# Altium PCB LTC5582.PcbDoc
Units mm, origin at the board's own origin, x right, y up, seen from the top; angles counter-clockwise.
Board outline 51.82 x 23.88 mm, 2 copper layers (Top Layer, Bottom Layer); 9 components, 7 nets, 33 pads, 13 vias.
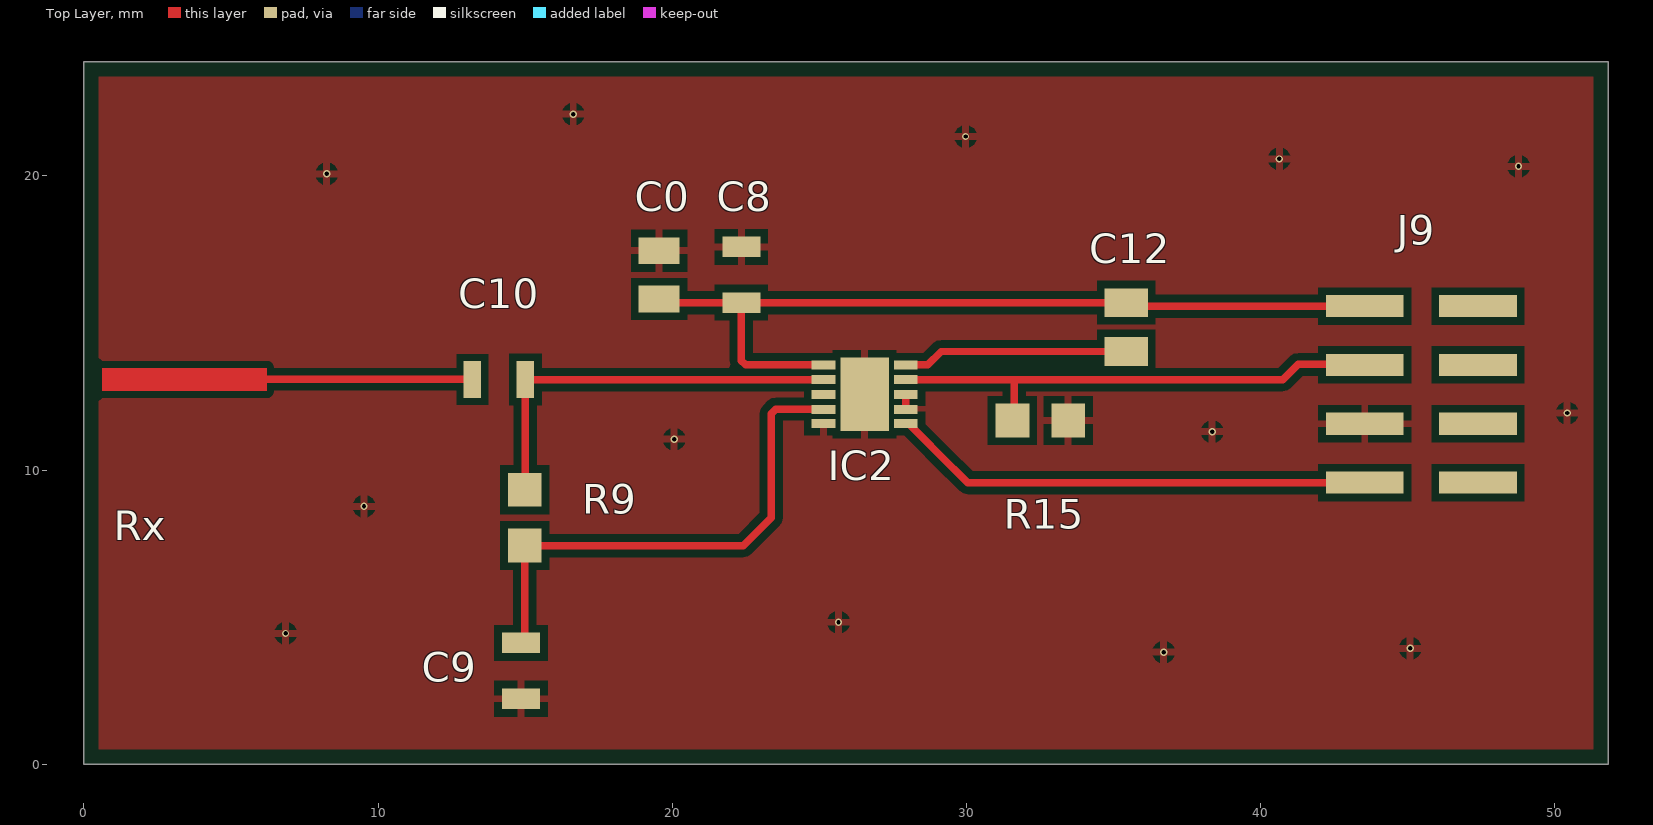
[diagram p0: Top Layer view]
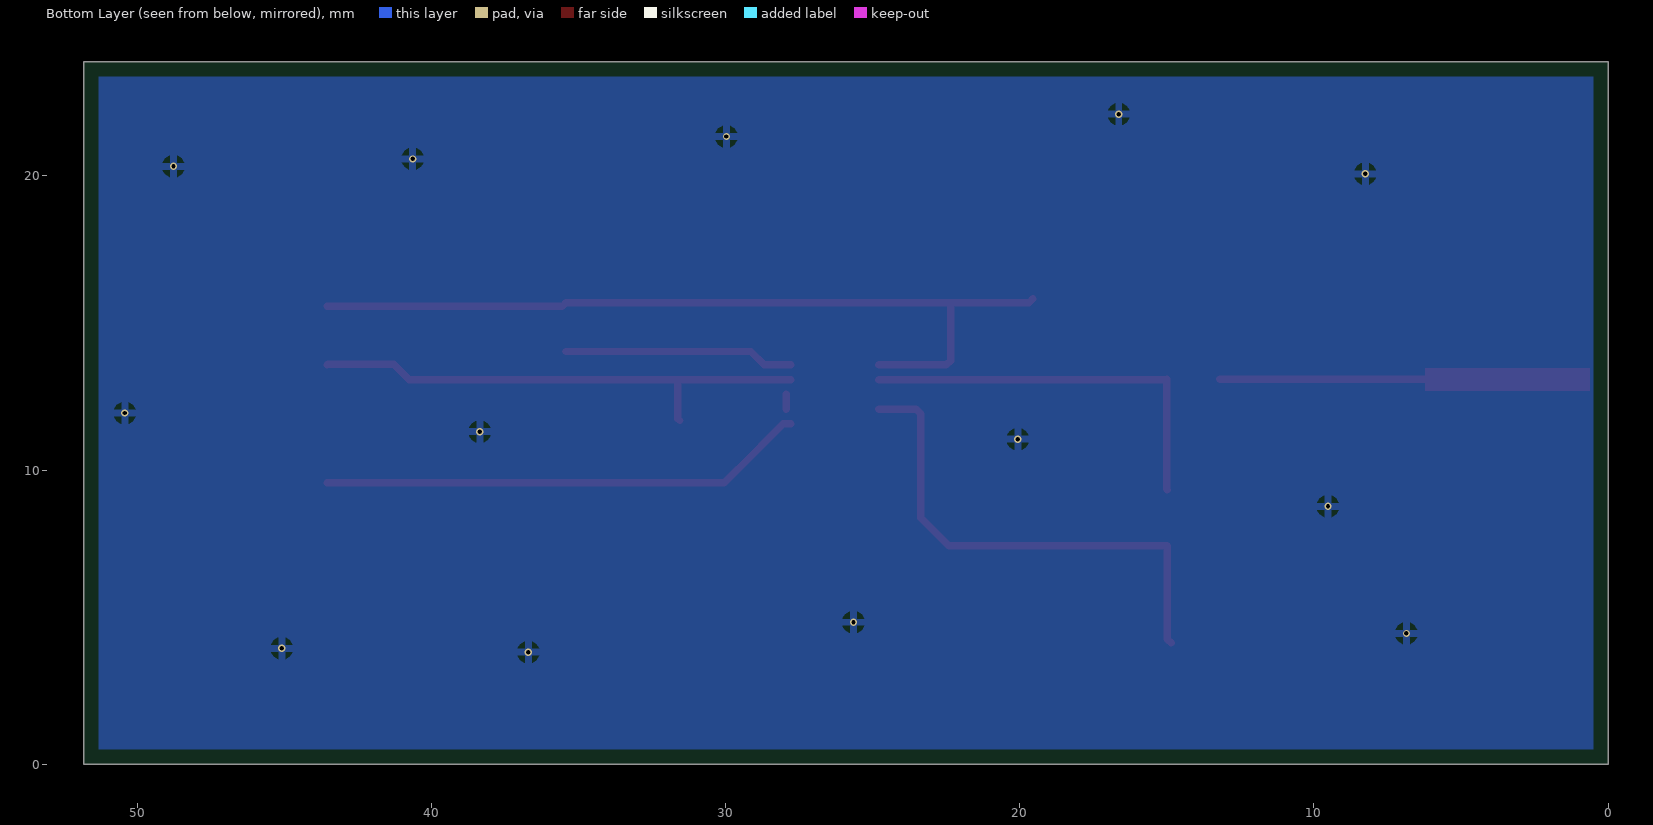
[diagram p1: Bottom Layer view, seen from below]
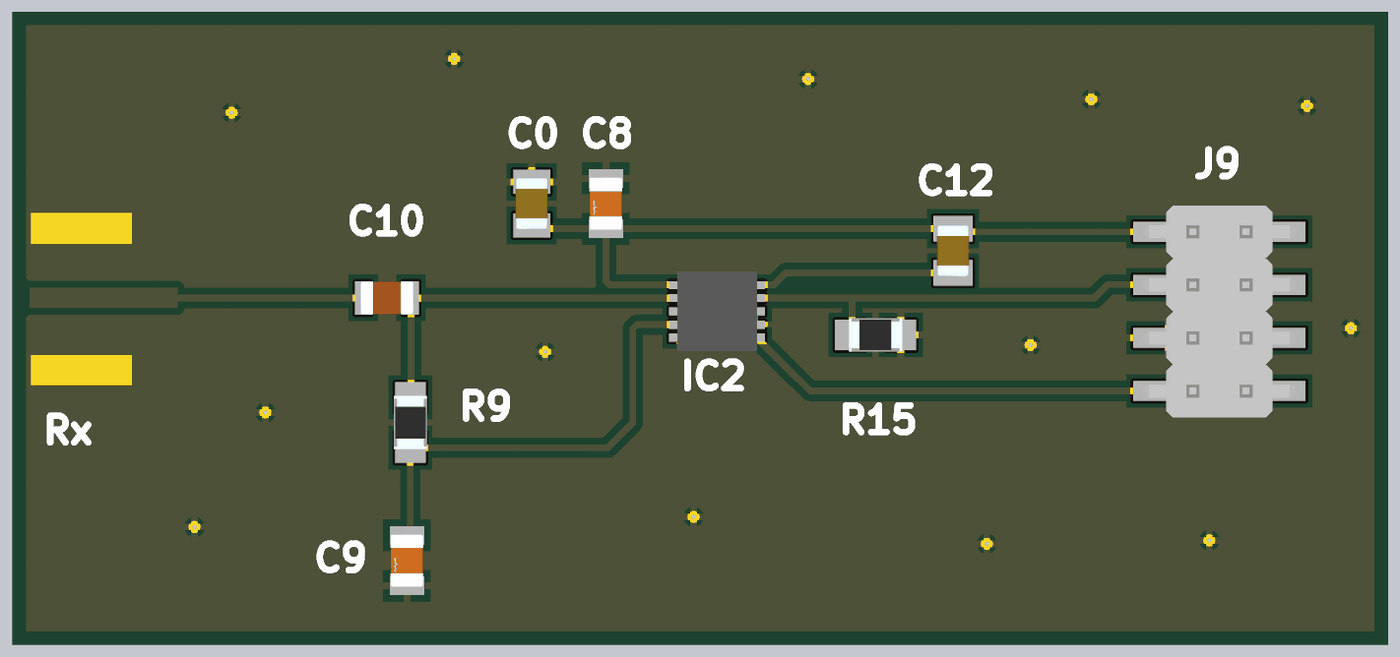
[diagram p2: 3D render of the assembled board from above, using the file's embedded part models]

## Layer stack, top to bottom
Top Solder: solder mask 0.0102, Solder Resist, Dk 3.5
Top Layer: signal copper 0.0356
Dielectric 1: dielectric 0.32, FR-4, Dk 4.8
Bottom Layer: signal copper 0.0356
Bottom Solder: solder mask 0.0102, Solder Resist, Dk 3.5

## Board outline
0,0 51.816,0 51.816,23.876 0,23.876

## Design rules (kind name [scope] priority, off if disabled: settings)
Clearance [All] p1: gap=0.254 ignorepadtopadclearanceinfootprint=FALSE except(0: Arc-Hole Track-Hole SMDPad-Hole THPad-Hole Via-Hole Fill-Hole Poly-Hole Region-Hole Text-Hole; 0.15: Arc-Arc Arc-Track Arc-SMDPad Track-Track Track-SMDPad SMDPad-SMDPad; 0.5: THPad-THPad)
MinimumSolderMaskSliver [All] p1: minsoldermaskwidth=0.1
PolygonConnect [All] p1: connectstyle=Relief reliefconductorwidth=0.254 reliefentries=4 polygonreliefangle="90 Angle" airgapwidth=0.254
RoutingLayers [All] p1: top layer_v5=TRUE bottom layer_v5=FALSE
RoutingVias [All] p1: holewidth=0.15 width=0.25 viastyle="Through Hole" minholewidth=0.15 minwidth=0.25 maxholewidth=0.2 maxwidth=0.3
SolderMaskExpansion [All] p1: expansion=0.102 istentingtop=FALSE
Width [All] p1: maxlimit=0.9 minlimit=0.15 preferedwidth=0.254 minimp=50.000000 maximp=50.000000 favimp=50.000000
28 further rules are at their usual default settings.

## Components (designator, comment, footprint, x,y, rotation, side; value= is the part's Value field where it differs from the comment)
C0 "GJ821BR71H105KA12K" CAPC2012X135N 19.558,16.637 r270 top
C8 "GRM21A5C2E102FWA1D" FP-GRM21A-0_2-MFG 22.352,16.637 r270 top
C9 "GRM21A5C2E102FWA1D" FP-GRM21A-0_2-MFG 14.859,3.175 r270 top
C10 "GRM21A5C2E271FW01D" GRM21x 14.108,13.081 r0 top
C12 "GRM21BR72A104JAC4K" CAPC2012X145N 35.433,14.859 r90 top
IC2 "LTC5582IDDPBF" DFN300X300X80-11N 26.543,12.573 r0 top (schematic designator IC?)
J9 "M22-5320405" HUSSP8W50P200_2X4_800X400X500P 45.466,12.573 r270 top
R9 "ERA-6AEB68R1V" ERA6AEB1020V 14.986,8.382 r270 top
R15 "ERA-6APB104V" ERA6AEB1020V 32.512,11.684 r180 top

## Footprints (in the part's own frame and the unit in brackets; to place one, negate y for a bottom-side part, rotate by r counter-clockwise, add the part's x,y. Pads: shape width x height; smd on the part's side, far side on the other; paste and mask are expansions set on the pad)
CAPC2012X135N [mm]
  rect 0.91x1.39 smd: 1(-0.82,0) 2(0.82,0)
  body extent -1,-0.63 1,0.63, height 1.35
CAPC2012X145N [mm]
  rect 0.97x1.47 smd: 1(-0.83,0) 2(0.83,0)
  body extent -1,-0.63 1,0.63, height 1.45
DFN300X300X80-11N [mil]
  rect 32x12 smd: 1(-55,39) 2(-55,20) 3(-55,0) 4(-55,-20) 5(-55,-39) 6(55,-39) 7(55,-20) 8(55,0) 9(55,20) 10(55,39)
  rect 65x98 smd: 11(0,0)
  body extent -59,-59 59,59, height 32
ERA6AEB1020V [mm]
  rect 1.15x1.15 smd: 1(-0.95,0) 2(0.95,0)
  body extent -1,-0.63 1,0.63, height 0.5
FP-GRM21A-0_2-MFG [mm]
  rect 0.7x1.3 smd paste+0 mask+0: 1(-0.95,0) 2(0.95,0)
  body extent -1.4,-0.82 1.4,0.82, height 0.25
GRM21x [mm]
  rect 0.6x1.25 smd: 1(-0.9,0) 2(0.9,0)
  body extent -1,-0.63 1,0.63, height 1
HUSSP8W50P200_2X4_800X400X500P [mm]
  rect 0.75x2.65 smd: 1(-3,-1.925) 2(-3,1.925) 3(-1,-1.925) 4(-1,1.925) 5(1,-1.925) 6(1,1.925) 7(3,-1.925) 8(3,1.925)
  body extent -4,-2.88 4,2.88, height 6

## Part data
C0: "Capacitor", Manufacturer_Name="Murata Electronics", Mouser Part Number=81-GJ821BR71H105KA2K, Datasheet Link=https://www.mouser.it/datasheet/2/281/GJ821BR71H105KA12-01-1633769.pdf, Height=1.35mm, Manufacturer_Part_Number=GJ821BR71H105KA12K, Mouser Price/Stock=https://www.mouser.co.uk/ProductDetail/Murata-Electronics/GJ821BR71H105KA12K?qs=QzBtWTOodeUPH%252BEtzhwB2g%3D%3D
C8 C9: library part CMP-06035-012030-1, "Chip Multilayer Ceramic Capacitors for General Purpose, 0805, 1000pF, C0G, 30ppm/°C, 1%, 250V"
C10: "Capacitor", Manufacturer_Name="Murata Electronics", Datasheet Link=https://search.murata.co.jp/Ceramy/image/img/A01X/G101/ENG/GRM21A5C2E271FW01-01.pdf, Height=1.25mm, Manufacturer_Part_Number=GRM21A5C2E271FW01D
C12: "Capacitor", Manufacturer_Name="Murata Electronics", Mouser Part Number=81-GRM21BR72A104JA4K, Datasheet Link=http://www.murata.com/~/media/webrenewal/support/library/catalog/products/capacitor/mlcc/c02e.pdf, Height=1.45mm, Manufacturer_Part_Number=GRM21BR72A104JAC4K, Mouser Price/Stock=https://www.mouser.co.uk/ProductDetail/Murata-Electronics/GRM21BR72A104JAC4K?qs=QzBtWTOodeUSx9SbLZkKhw%3D%3D
IC2: "Integrated Circuit", Manufacturer_Name="Analog Devices", Manufacturer_Part_Number=LTC5582IDDPBF
J9: "Connector", Manufacturer_Name=Harwin, Mouser Part Number=855-M22-5320405, Datasheet Link=https://cdn.harwin.com/pdfs/M22-532.pdf, Manufacturer_Part_Number=M22-5320405, Mouser Price/Stock=https://www.mouser.co.uk/ProductDetail/Harwin/M22-5320405?qs=WS5Jv%252B%252Bx1qVxYYIoWES7kw%3D%3D
R9: "Resistor", Manufacturer_Name=Panasonic, Mouser Part Number=667-ERA-6AEB68R1V, Datasheet Link=https://industrial.panasonic.com/cdbs/www-data/pdf/RDM0000/AOA0000C307.pdf, Height=0.6mm, Manufacturer_Part_Number=ERA-6AEB68R1V, Mouser Price/Stock=https://www.mouser.com/Search/Refine.aspx?Keyword=667-ERA-6AEB68R1V
R15: "Resistor", Manufacturer_Name=Panasonic, Mouser Part Number=667-ERA-6APB104V, Datasheet Link=https://industrial.panasonic.com/cdbs/www-data/pdf/RDM0000/AOA0000C307.pdf, Height=0.6mm, Manufacturer_Part_Number=ERA-6APB104V, Mouser Price/Stock=https://www.mouser.co.uk/ProductDetail/Panasonic/ERA-6APB104V?qs=ob%252BdNz2%252BYEgDh5VhH%252BZENQ%3D%3D

## Via types
v1: diameter 0.25, hole 0.15, Top Layer to Bottom Layer, 13 vias

## Nets (pads, with @x,y where several pads share a name; then routed paths per layer and width w, separated by ;. In a path a pad name is that pad's centre, name@x,y a point inside that pad or via, vN(x,y) a via of type N, cw(c..) or ccw(c..) an arc to the next point about the centre after c; other vN are vias at no path point)
GND: C0.1 C8.1 C9.2 IC2.5 IC2.7 IC2.8 IC2.11 J9.5 R15.1 | length 0.5
  Top Layer w0.254: IC2.7 IC2.8
  other v1: 36.703,3.81 45.085,3.937 6.858,4.445 25.654,4.826 9.525,8.763 20.066,11.049 38.354,11.303 50.419,11.938 8.255,20.066 48.768,20.32 40.64,20.574 29.972,21.336 16.637,22.098
NetC9_1: C9.1 IC2.4 R9.2 | length 17.2
  Top Layer w0.254: C9.1 14.986,4.252 R9.2 22.418,7.432 23.368,8.382 23.368,11.916 23.525,12.073 IC2.4@24.789,12.073
NetC10_2: C10.2 IC2.2 R9.1 | length 13.5
  Top Layer w0.254: R9.1 15.008,9.354 C10.2 15.016,13.073 IC2.2@24.789,13.073
NetC12_1: C12.1 IC2.10 | length 7.8
  Top Layer w0.254: IC2.10@27.789,13.573 28.686,13.573 29.142,14.029 C12.1
NetIC?_6: IC2.6 J9.7 | length 16.6
  Top Layer w0.254: IC2.6@27.789,11.573 28.039,11.573 29.579,10.033 29.591,10.033 30.051,9.573 J9.7
NetIC?_9: IC2.9 J9.3 R15.2 | length 17.2
  Top Layer w0.254: IC2.9@27.789,13.073 31.474,13.073 40.759,13.073 41.275,13.589 43.525,13.589 J9.3 ; R15.2 31.623,11.745 31.623,12.924
VCC: C0.2 C8.2 C12.2 IC2.1 J9.1 | length 28.5
  Top Layer w0.254: C0.2 19.688,15.687 C8.2 ; IC2.1@24.789,13.573 22.501,13.573 22.352,13.722 C8.2 ; J9.1 35.545,15.573 35.431,15.687 C8.2
pads on no net: C10.1 IC2.3 J9.2 J9.4 J9.6 J9.8
copper on no net: | length 7
  Top Layer w0.254: 6.223,13.081 13.208,13.081

## Polygon pours and split planes (outlines as drawn)
GND on Bottom Layer "NONET_L-01_P-001" (solid, pour order 0): 0.508,23.368 51.308,23.368 51.308,0.508 0.508,0.508
no net on Top Solder "NONET_L-01_P-001" (solid): 0.699,10.922 4.5,10.922 4.5,9.779 0.699,9.779
no net on Top Solder "NONET_L-01_P-001" (solid): 0.7,15.113 4.5,15.113 4.5,16.278 0.7,16.278
GND on Top Layer "NONET_L-01_P-001" (solid, pour order 4): 0.508,0.508 0.508,23.368 51.308,23.368 51.308,0.508
no net on Bottom Solder "NONET_L-01_P-001" (solid): 0.762,2.032 2.286,2.032 2.286,0.762 0.762,0.762

## Other copper
Top Layer:
  region: 6.223,13.462 0.635,13.462 0.635,12.7 6.223,12.7

## Silkscreen, mask and mechanical layers (free items; w line width, h text height)
Top Overlay:
  text "Rx" at 1.016,7.62 h1
Mechanical 1:
  lines w0.254: 0.254,0.254 0.254,23.622 51.562,23.622 51.562,0.254 0.254,0.254